# Altium PCB elec_array.PcbDoc
Units mm, origin at the board's own origin, x right, y up, seen from the top; angles counter-clockwise.
Board outline 18 x 71.25 mm, 2 copper layers (Top Layer, Bottom Layer); 11 components, 10 nets, 20 pads, 0 vias.
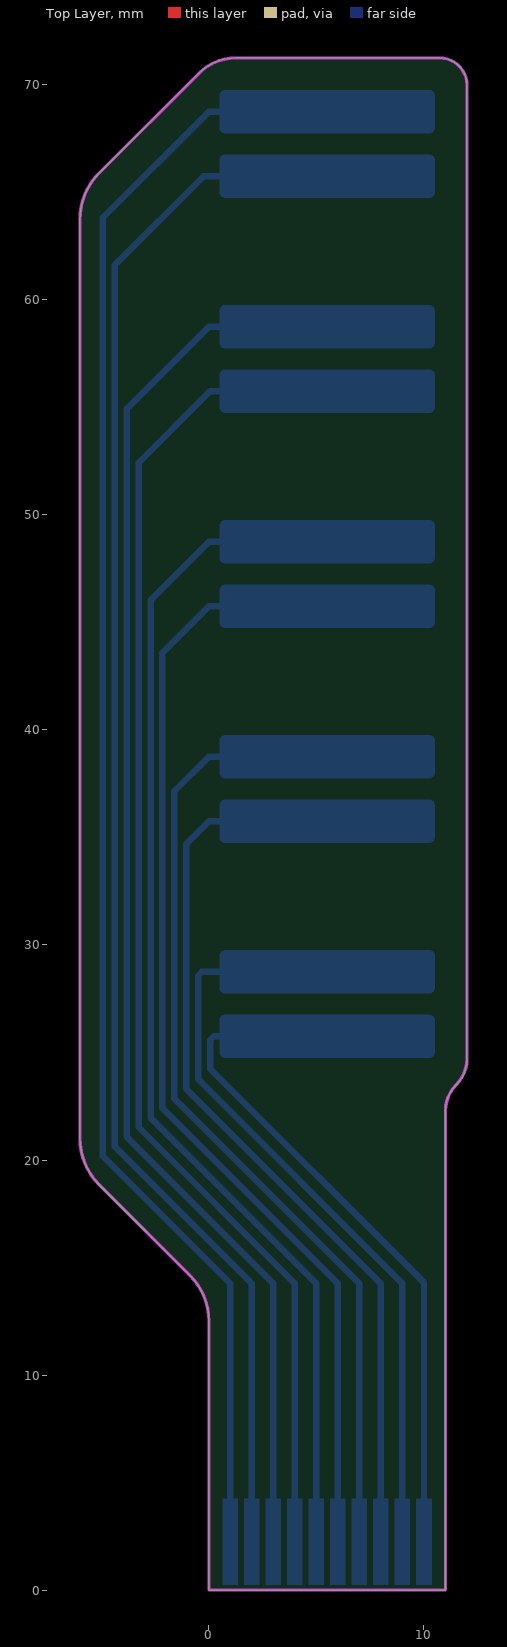
[diagram p0: Top Layer view]
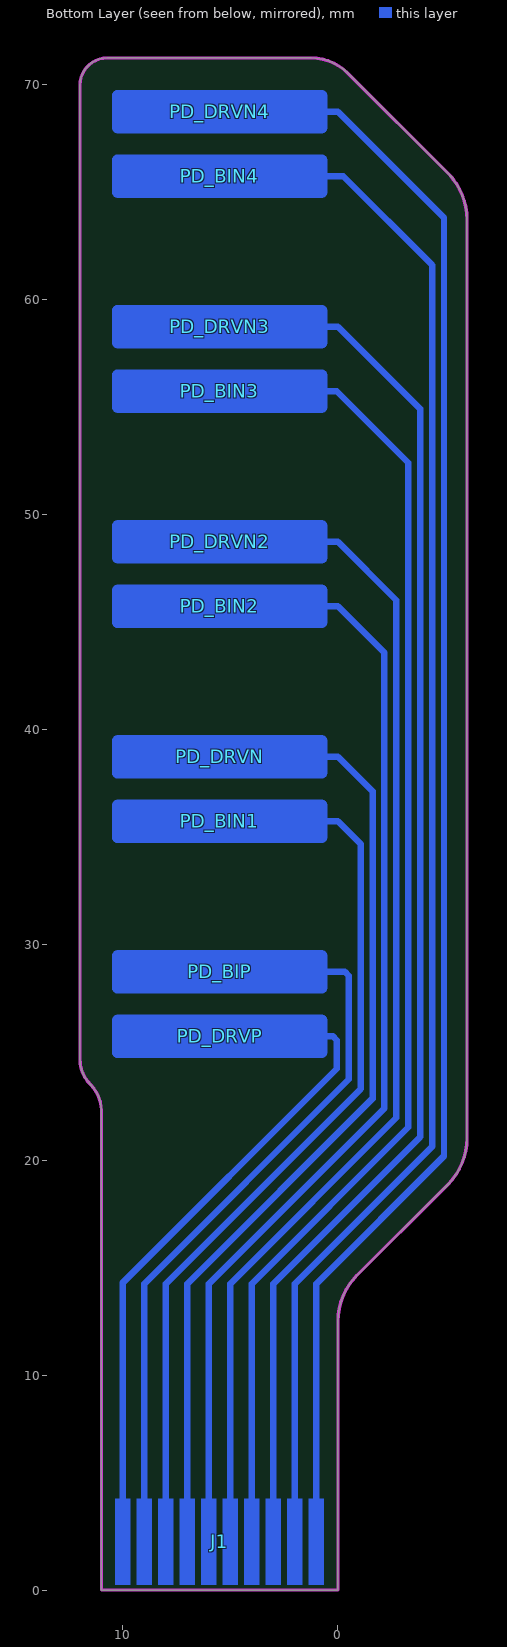
[diagram p1: Bottom Layer view, seen from below]

## Layer stack, top to bottom
Board Layer Stack Top Coverlay: solder mask 0.0254, SM-001, Dk 4
Board Layer Stack Top Coverlay: solder mask 0.012, FC-001, Dk 4
Top Layer: signal copper 0.0356
Dielectric 1: dielectric 0.32, FR-4, Dk 4.8
Bottom Layer: signal copper 0.0356
Board Layer Stack Bottom Solder: solder mask 0.012, FC-001, Dk 4
Board Layer Stack Bottom Solder: solder mask 0.0254, SM-001, Dk 4

## Board outline
-4.75,18.5 -5.102,18.852 cw(c-2.934,21.02) -6,21.02 -6,63.73 cw(c-2.934,63.73) -5.102,65.898 -0.457,70.543 cw(c1.25,68.836) 1.25,71.25 10.73,71.25 cw(c10.73,69.98) 12,69.98 12,24.707 cw(c10.293,24.707) 11.5,23.5 ccw(c12.707,22.293) 11,22.293 11,0 0,0 0,12.5 ccw(c-3.018,12.5) -0.884,14.634 -1,14.75

## Design rules (kind name [scope] priority, off if disabled: settings)
Clearance [All] p1: gap=0.254 ignorepadtopadclearanceinfootprint=FALSE ismatrix=TRUE
ComponentClearance [All] p1: gap=0.001 collisioncheckmode=3 verticalgap=0.254 showdistances=FALSE
DiffPairsRouting [All] p1: maxlimit=0.254 minlimit=0.254 mostfreqgap=0.254 toplayer_minwidth=0.381 toplayer_maxwidth=0.381 toplayer_prefwidth=0.381 bottomlayer_minwidth=0.381 bottomlayer_maxwidth=0.381 bottomlayer_prefwidth=0.381 substack1={BB0108AA-5268-43A3-A6F3-C39A9225E165} toplayer_{bb0108aa-5268-43a3-a6f3-c39a9225e165}_minwidth=0.381 toplayer_{bb0108aa-5268-43a3-a6f3-c39a9225e165}_maxwidth=0.381 toplayer_{bb0108aa-5268-43a3-a6f3-c39a9225e165}_prefwidth=0.381 bottomlayer_{bb0108aa-5268-43a3-a6f3-c39a9225e165}_minwidth=0.381 bottomlayer_{bb0108aa-5268-43a3-a6f3-c39a9225e165}_maxwidth=0.381 bottomlayer_{bb0108aa-5268-43a3-a6f3-c39a9225e165}_prefwidth=0.381 maxuncoupledlength=12.7
PolygonConnect [All] p1: connectstyle=Relief reliefconductorwidth=0.254 reliefentries=4 polygonreliefangle="90 Angle" airgapwidth=0.254
RoutingVias [All] p1: holewidth=0.711 width=1.27 viastyle="Through Hole" minholewidth=0.711 minwidth=1.27 maxholewidth=0.711 maxwidth=1.27
SolderMaskExpansion [All] p1: expansion=0.102 istentingtop=FALSE
Width MaxMinWidth_1 [All] p1: maxlimit=0.254 minlimit=0.254 preferedwidth=0.254 substack1={BB0108AA-5268-43A3-A6F3-C39A9225E165}
28 further rules are at their usual default settings.

## Components (designator, comment, footprint, x,y, rotation, side; value= is the part's Value field where it differs from the comment)
J1 "Array_Conn_Mate_Pad" ARRAY_CONN_MATE_PAD 0.55,0.2 r0 bottom
PD_BIN1 "Skin_Interface_Pad" Skin_Interface_Pad 10.5,36.75 r270 bottom
PD_BIN2 "Skin_Interface_Pad" Skin_Interface_Pad 10.5,46.75 r270 bottom
PD_BIN3 "Skin_Interface_Pad" Skin_Interface_Pad 10.5,56.75 r270 bottom
PD_BIN4 "Skin_Interface_Pad" Skin_Interface_Pad 10.5,66.75 r270 bottom
PD_BIP "Skin_Interface_Pad" Skin_Interface_Pad 10.5,29.75 r270 bottom
PD_DRVN "Skin_Interface_Pad" Skin_Interface_Pad 10.5,39.75 r270 bottom
PD_DRVN2 "Skin_Interface_Pad" Skin_Interface_Pad 10.5,49.75 r270 bottom
PD_DRVN3 "Skin_Interface_Pad" Skin_Interface_Pad 10.5,59.75 r270 bottom
PD_DRVN4 "Skin_Interface_Pad" Skin_Interface_Pad 10.5,69.75 r270 bottom
PD_DRVP "Skin_Interface_Pad" Skin_Interface_Pad 10.5,26.75 r270 bottom

## Footprints (in the part's own frame and the unit in brackets; to place one, negate y for a bottom-side part, rotate by r counter-clockwise, add the part's x,y. Pads: shape width x height; smd on the part's side, far side on the other; paste and mask are expansions set on the pad)
ARRAY_CONN_MATE_PAD [mm]
  round 0.025 smd: 1(0.45,-2.05) 2(1.45,-2.05) 3(2.45,-2.05) 4(3.45,-2.05) 5(4.45,-2.05) 6(5.45,-2.05) 7(6.45,-2.05) 8(7.45,-2.05) 9(8.45,-2.05) 10(9.45,-2.05)
  Top Layer region: 7.1,-4.05 7.8,-4.05 7.8,-0.05 7.1,-0.05
  Top Layer region: 5.1,-4.05 5.8,-4.05 5.8,-0.05 5.1,-0.05
  Top Layer region: 3.1,-4.05 3.8,-4.05 3.8,-0.05 3.1,-0.05
  Top Layer region: 1.1,-4.05 1.8,-4.05 1.8,-0.05 1.1,-0.05
  Top Layer region: 8.1,-4.05 8.8,-4.05 8.8,-0.05 8.1,-0.05
  Top Layer region: 6.1,-4.05 6.8,-4.05 6.8,-0.05 6.1,-0.05
  Top Layer region: 4.1,-4.05 4.8,-4.05 4.8,-0.05 4.1,-0.05
  Top Layer region: 2.1,-4.05 2.8,-4.05 2.8,-0.05 2.1,-0.05
  Top Layer region: 0.1,-4.05 0.8,-4.05 0.8,-0.05 0.1,-0.05
  Top Layer region: 9.1,-4.05 9.8,-4.05 9.8,-0.05 9.1,-0.05
Skin_Interface_Pad [mm]
  round 0.025 smd: 1(1,5)
  Top Layer region: 0,0.254 0,9.746 0.019,9.843 0.074,9.926 0.157,9.981 0.254,10 0.254,10 1.746,10 1.843,9.981 1.926,9.926 1.981,9.843 2,9.746 2,9.746 2,0.254 1.981,0.157 1.926,0.074 1.843,0.019 1.746,0 1.746,0 0.254,0 0.157,0.019 0.074,0.074 0.019,0.157 0,0.254

## Part data
J1: System=Connector

## Nets (pads, with @x,y where several pads share a name; then routed paths per layer and width w, separated by ;. In a path a pad name is that pad's centre, name@x,y a point inside that pad or via, vN(x,y) a via of type N, cw(c..) or ccw(c..) an arc to the next point about the centre after c; other vN are vias at no path point)
NetJ1_1: J1.1 PD_DRVN4.1 | length 76.8
  Bottom Layer w0.3: 1,2 1,14.25 -4.932,20.182 -4.932,63.818 0,68.75 PD_DRVN4.1
NetJ1_2: J1.2 PD_BIN4.1 | length 73.9
  Bottom Layer w0.3: 2,1.983 2,14.25 -4.378,20.628 -4.378,61.618 -0.246,65.75 PD_BIN4.1
NetJ1_3: J1.3 PD_DRVN3.1 | length 66.7
  Bottom Layer w0.3: 3,2 3,14.25 -3.824,21.074 -3.824,54.926 0,58.75 PD_DRVN3.1
NetJ1_4: J1.4 PD_BIN3.1 | length 63.6
  Bottom Layer w0.3: 4,2 4,14.25 -3.27,21.52 -3.27,52.426 0.054,55.75 PD_BIN3.1
NetJ1_5: J1.5 PD_DRVN2.1 | length 56.6
  Bottom Layer w0.3: 5,1.983 5,14.25 -2.716,21.966 -2.716,46.034 0,48.75 PD_DRVN2.1
NetJ1_6: J1.6 PD_BIN2.1 | length 53.5
  Bottom Layer w0.3: PD_BIN2.1 0,45.75 -2.162,43.588 -2.162,22.412 6,14.25 6,2
NetJ1_7: J1.7 PD_DRVN.1 | length 46.5
  Bottom Layer w0.3: PD_DRVN.1 0,38.75 -1.608,37.142 -1.608,22.858 7,14.25 7,1.96
NetJ1_8: J1.8 PD_BIN1.1 | length 43.4
  Bottom Layer w0.3: PD_BIN1.1 0,35.75 -1.054,34.696 -1.054,23.304 8,14.25 8,2
NetJ1_9: J1.9 PD_BIP.1 | length 36.6
  Bottom Layer w0.3: PD_BIP.1 -0.324,28.75 -0.5,28.574 -0.5,23.75 9,14.25 9,2
NetJ1_10: J1.10 PD_DRVP.1 | length 33.2
  Bottom Layer w0.3: PD_DRVP.1 0.23,25.75 0.054,25.574 0.054,24.25 10,14.304 10,2

## Keep-outs
Keep-Out Layer:
  lines w0.15: -6,21.02 ccw(c-2.934,21.02) -5.102,18.852 -4.75,18.5 -1,14.75 -0.884,14.634 cw(c-3.018,12.5) 0,12.5 0,0 11,0 11,21.939 11,22.293 cw(c12.707,22.293) 11.5,23.5 ccw(c10.293,24.707) 12,24.707 12,69.75 12,69.98 ccw(c10.73,69.98) 10.73,71.25 1.25,71.25 ccw(c1.25,68.836) -0.457,70.543 -5.102,65.898 ccw(c-2.934,63.73) -6,63.73 -6,63.445 -6,21.25 -6,21.02